# EAGLE board CP2102 USB to Serial Breakout (EAGLE 6.3)
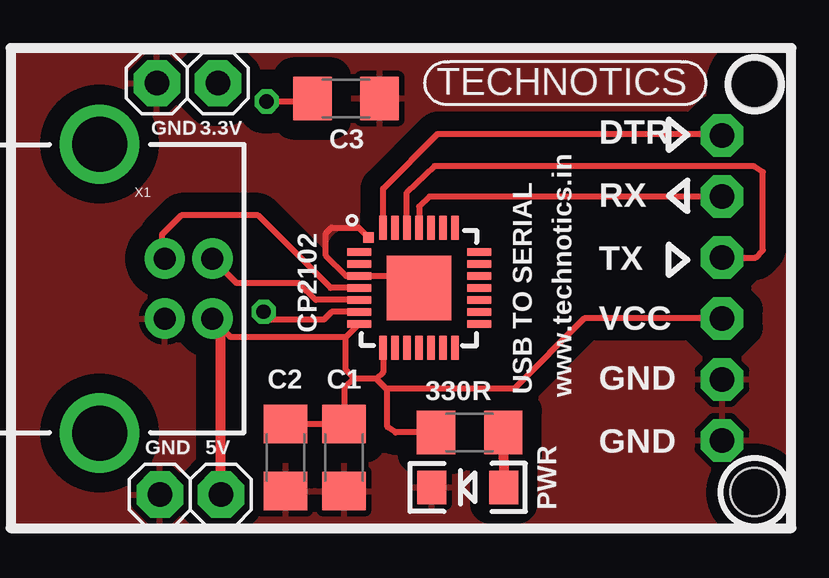
[diagram p0: board, top side]
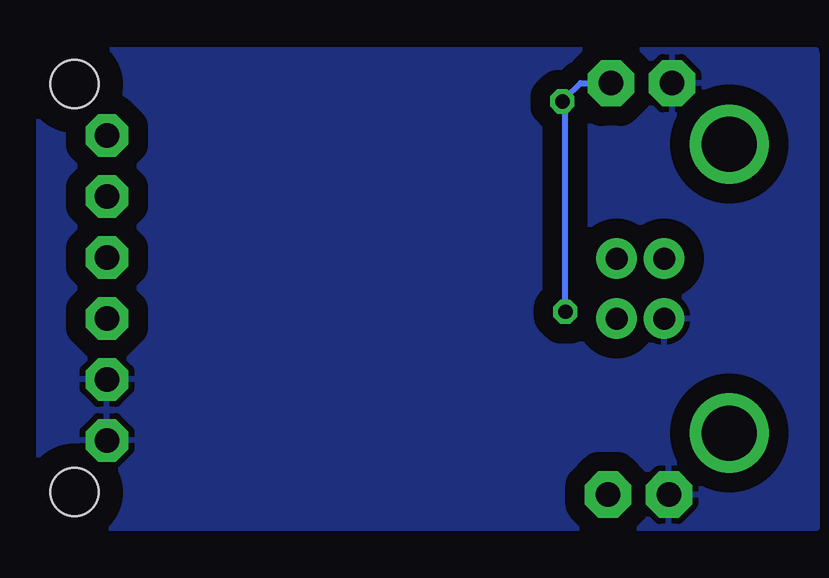
[diagram p1: board, bottom side, seen from below]

No outline drawn. Coordinates in mm, seen from the top.
Copper layers (1*16): Top 0.035mm / dielectric 1.5mm / Bottom 0.035mm
Design rules "default": minimum track width 10mil, minimum drill 24mil, track to track 8mil, track to pad 8mil, pad to pad 8mil, via to via 8mil, smd to smd 8mil, copper to edge 40mil, drill to drill 8mil, minimum pad ring 10mil, minimum via ring 8mil, stop-mask expansion 4mil, vias tented up to drill 0mil, thermal gap 10mil
Holes 2 mm at 31,1.5 31,18.5

## Footprints (pad centres in the part's own frame; a part is rotated, then mirrored left to right if it is on the bottom)
C1206 = smd 1.6 x 1.8: 1 -1.4,0; 2 1.4,0
1X06-CLEANBIG = drill 1.016 pad 1.778 octagon: 1 -6.35,0; 2 -3.81,0; 3 -1.27,0; 4 1.27,0; 5 3.81,0; 6 6.35,0
1X01 = drill 1.016 pad 1.93 octagon: 1 0,0
LED-1206 = smd 1.2 x 1.4: A -1.5,0; C 1.5,0
1206 = smd 1.6 x 1.8: 1 -1.4,0; 2 1.4,0
MLP28 = smd 1 x 0.3: 1 -2.5,1.5; 2 -2.5,1; 3 -2.5,0.5; 4 -2.5,0; 5 -2.5,-0.5; 6 -2.5,-1; 7 -2.5,-1.5; 15 2.5,-1.5; 16 2.5,-1; 17 2.5,-0.5; 18 2.5,0; 19 2.5,0.5; 20 2.5,1; 21 2.5,1.5 | smd 0.3 x 1: 8 -1.5,-2.5; 9 -1,-2.5; 10 -0.5,-2.5; 11 0,-2.5; 12 0.5,-2.5; 13 1,-2.5; 14 1.5,-2.5; 22 1.5,2.5; 23 1,2.5; 24 0.5,2.5; 25 0,2.5; 26 -0.5,2.5; 27 -1,2.5; 28 -1.5,2.5 | smd 2.7 x 2.7: EXP 0,0 | smd 0.435 x 0.435: M -2.103,2.103
USB-B-PTH = drill 0.914 pad 1.676: D+ 0,1.25; D- 1.981,1.25; GND 0,-1.25; VBUS 1.981,-1.25 | drill 2.286: P$1 -2.718,-6.02; P$2 -2.718,6.02

## Placement (x,y rotation side)
C1  1uF  [C1206]  11.46,2.95 270 top
C2  0.1uF  [C1206]  13.97,17.91 0 top
C3  10uF  [C1206]  13.89,2.95 270 top
FTDI  [1X06-CLEANBIG]  29.64,10.01 90 top
JP1  [1X01]  8.64,18.54 0 top
JP2  [1X01]  6.1,18.54 0 top
JP3  [1X01]  8.76,1.4 0 top
JP4  [1X01]  6.22,1.4 0 top
LED1  Red  [LED-1206]  19.05,1.7 180 top
R1  330  [1206]  19.13,3.99 180 top
U1  CP2102  [MLP28]  17.02,10.01 0 top
U$1  [LOGONAME]  28.19,19.18 180 top
X1  USBPTH  [USB-B-PTH]  6.43,9.98 0 top

## Library data of the parts
C1-C3 FTDI JP1-JP4 = adafruit
LED1 R1 U1 X1 = SparkFun
U$1 = TECHNOTICSLIB

## Nets
3.3V: C2.1 JP1.1 U1.6
CTS: U1.23
DCD: U1.1
DSR: U1.27
DTR: FTDI.6 U1.28
GND: C1.2 C2.2 C3.2 FTDI.1 FTDI.2 JP2.1 JP4.1 LED1.C U1.3 U1.EXP U1.M X1.GND
N$1: U1.5 X1.D-
N$2: U1.4 X1.D+
N$3: LED1.A R1.1
RI: U1.2
RST: U1.9
RTS: U1.24
RX: FTDI.5 U1.25
SUSP1: U1.12
SUSP2: U1.11
TX: FTDI.4 U1.26
VCC: C1.1 C3.1 FTDI.3 JP3.1 R1.2 U1.7 U1.8 X1.VBUS

## Tracks (layer width: path | path; a pad name or v marks a point on that pad's centre or on a via)
3.3V  (via drill 0.6)
  Top 0.254: U1.6 13.38,9.01 13.06,8.69 10.87,8.69 v10.54,9.02 | v10.67,17.78 12.19,17.78 C2.1
  Bottom 0.254: v10.54,9.02 10.54,17.65 | 10.54,17.65 v10.67,17.78 | 10.54,17.65 10.54,17.91 9.91,18.54 JP1.1
DTR
  Top 0.254: U1.28 15.52,14.15 17.8,16.43 29.57,16.43 FTDI.6
GND
  Top 0.254: U1.EXP 16.52,10.51 U1.3 13.98,10.51 13.13,11.35 13.13,12.29 13.36,12.52 14.5,12.52 U1.M
  pour Top (isolate 0.813): 0,20 0,0 32.34,-0.08 32.34,19.92
  pour Bottom (isolate 0.813): 0.1,19.91 32.49,19.91 32.49,0.03 0.05,0.03 0.05,19.74
N$1
  Top 0.254: U1.5 12.72,9.51 12.01,10.21 9.43,10.21 X1.D-
N$2
  Top 0.254: U1.4 13.34,10.01 10.31,13.03 7.11,13.03 6.3,12.22 6.3,11.36 X1.D+
N$3
  Top 0.406: R1.1 LED1.A
RX
  Top 0.254: FTDI.5 17.45,13.82 17.02,13.41 U1.25
TX
  Top 0.254: FTDI.4 31.04,11.28 31.34,11.58 31.34,14.83 30.96,15.09 17.65,15.09 16.51,13.99 16.51,12.49 U1.26
VCC
  Top 0.254: U1.8 15.52,6.5 15.24,6.22 | 15.24,6.22 14.3,6.22 | 14.3,6.22 13.97,6.6 13.97,7.96 | 13.97,7.96 U1.7 | 13.97,7.96 9.18,7.96 8.89,8.25 | 8.89,8.25 X1.VBUS | C1.1 C3.1 13.92,4.32 13.92,5.87 14.3,6.22 | R1.2 16.03,3.99 15.7,4.22 15.7,5.77 15.65,5.82 | FTDI.3 23.9,8.74 20.98,5.82 15.65,5.82 | 15.65,5.82 15.24,6.22 | 8.76,8.13 8.89,8.25
  Top 0.406: JP3.1 8.76,8.38 X1.VBUS

## Text on the board
tPlace: C3 | GND | 3.3V | DTR | RX | CP2102 | TX | VCC | C2 | C1 | USB TO SERIAL | GND | 330R | www.technotics.in | GND | 5V | GND | PWR